# Altium PCB RC_Car_ATMEGA8.PcbDoc
Units mm, origin at the board's own origin, x right, y up, seen from the top; angles counter-clockwise.
Board outline 80.4 x 99.1 mm, 2 copper layers (Top Layer, Bottom Layer); 43 components, 38 nets, 170 pads, 22 vias.
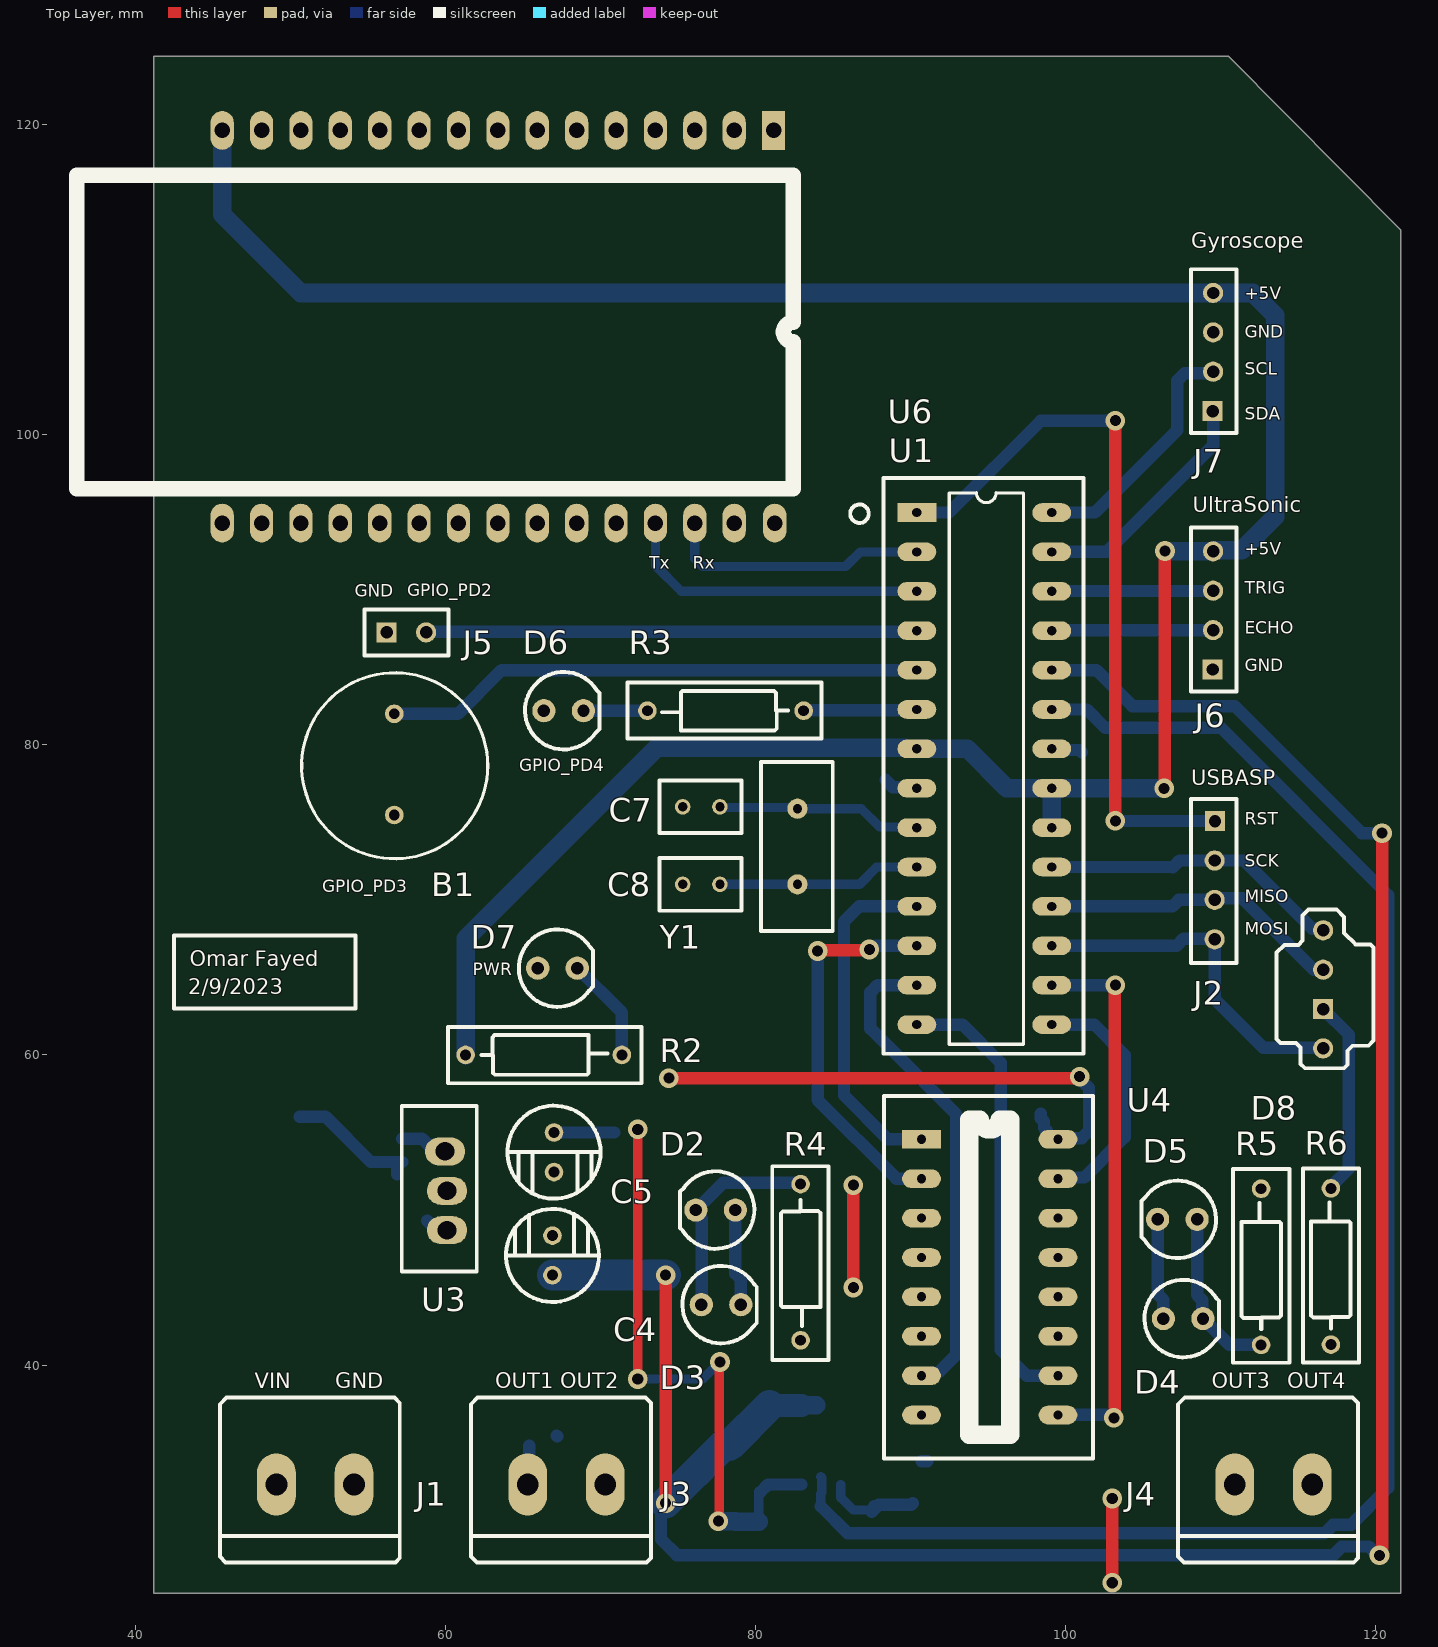
[diagram p0: Top Layer view]
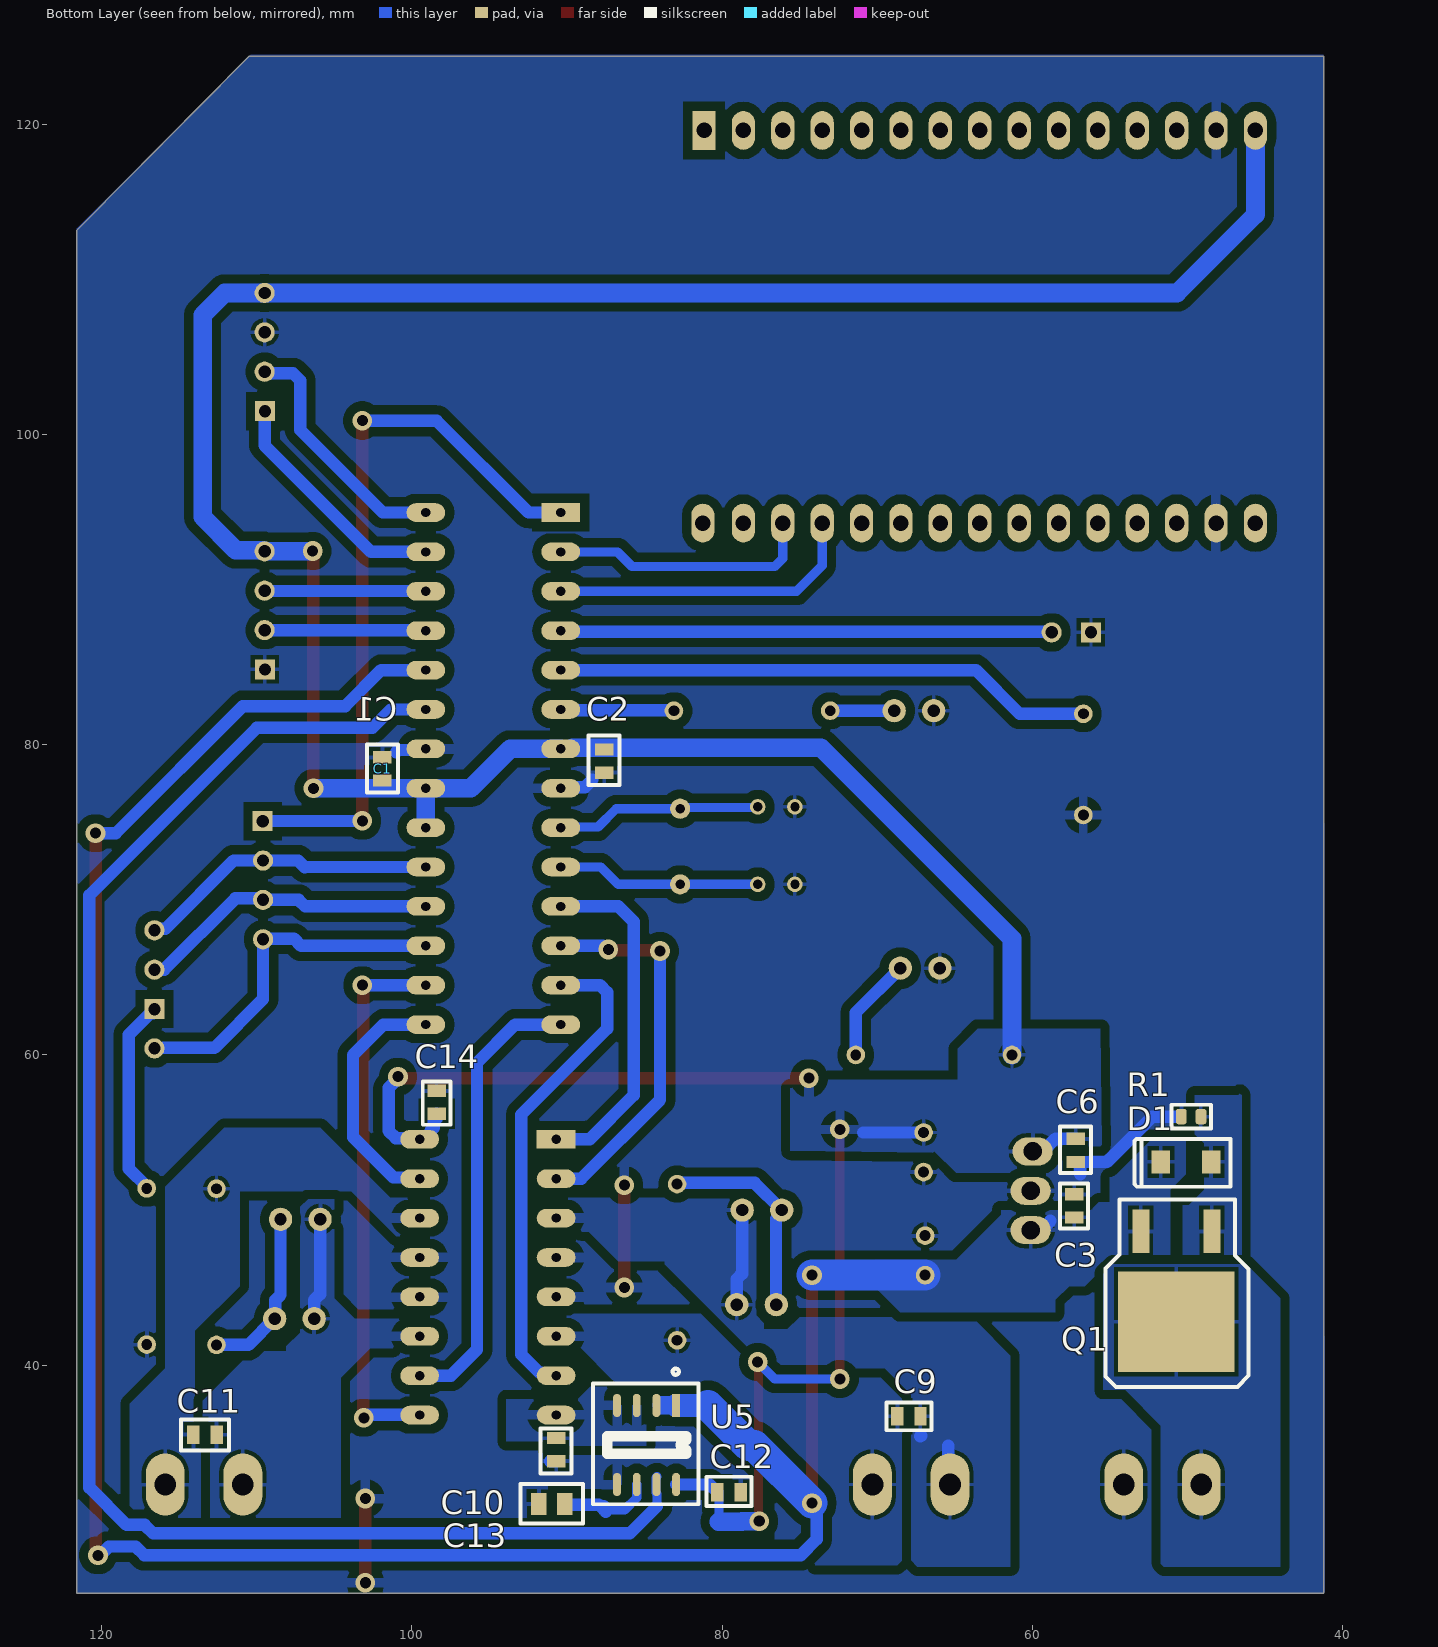
[diagram p1: Bottom Layer view, seen from below]
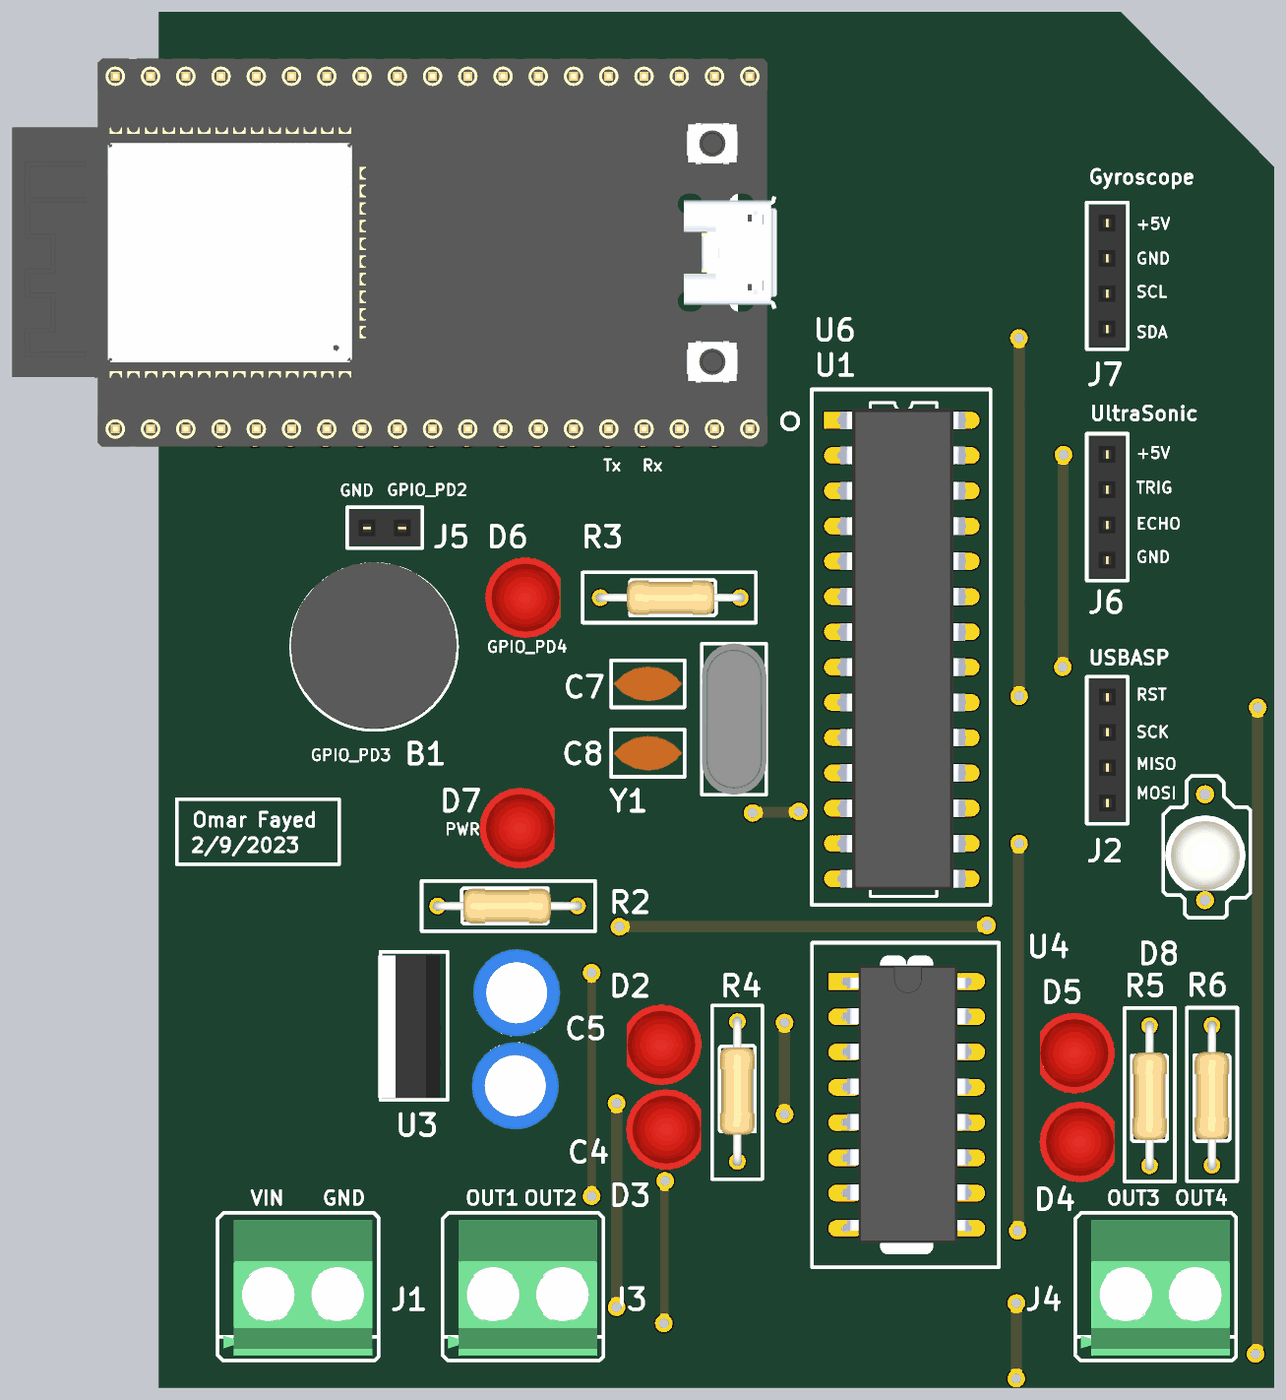
[diagram p2: 3D render of the assembled board from above, using the file's embedded part models]
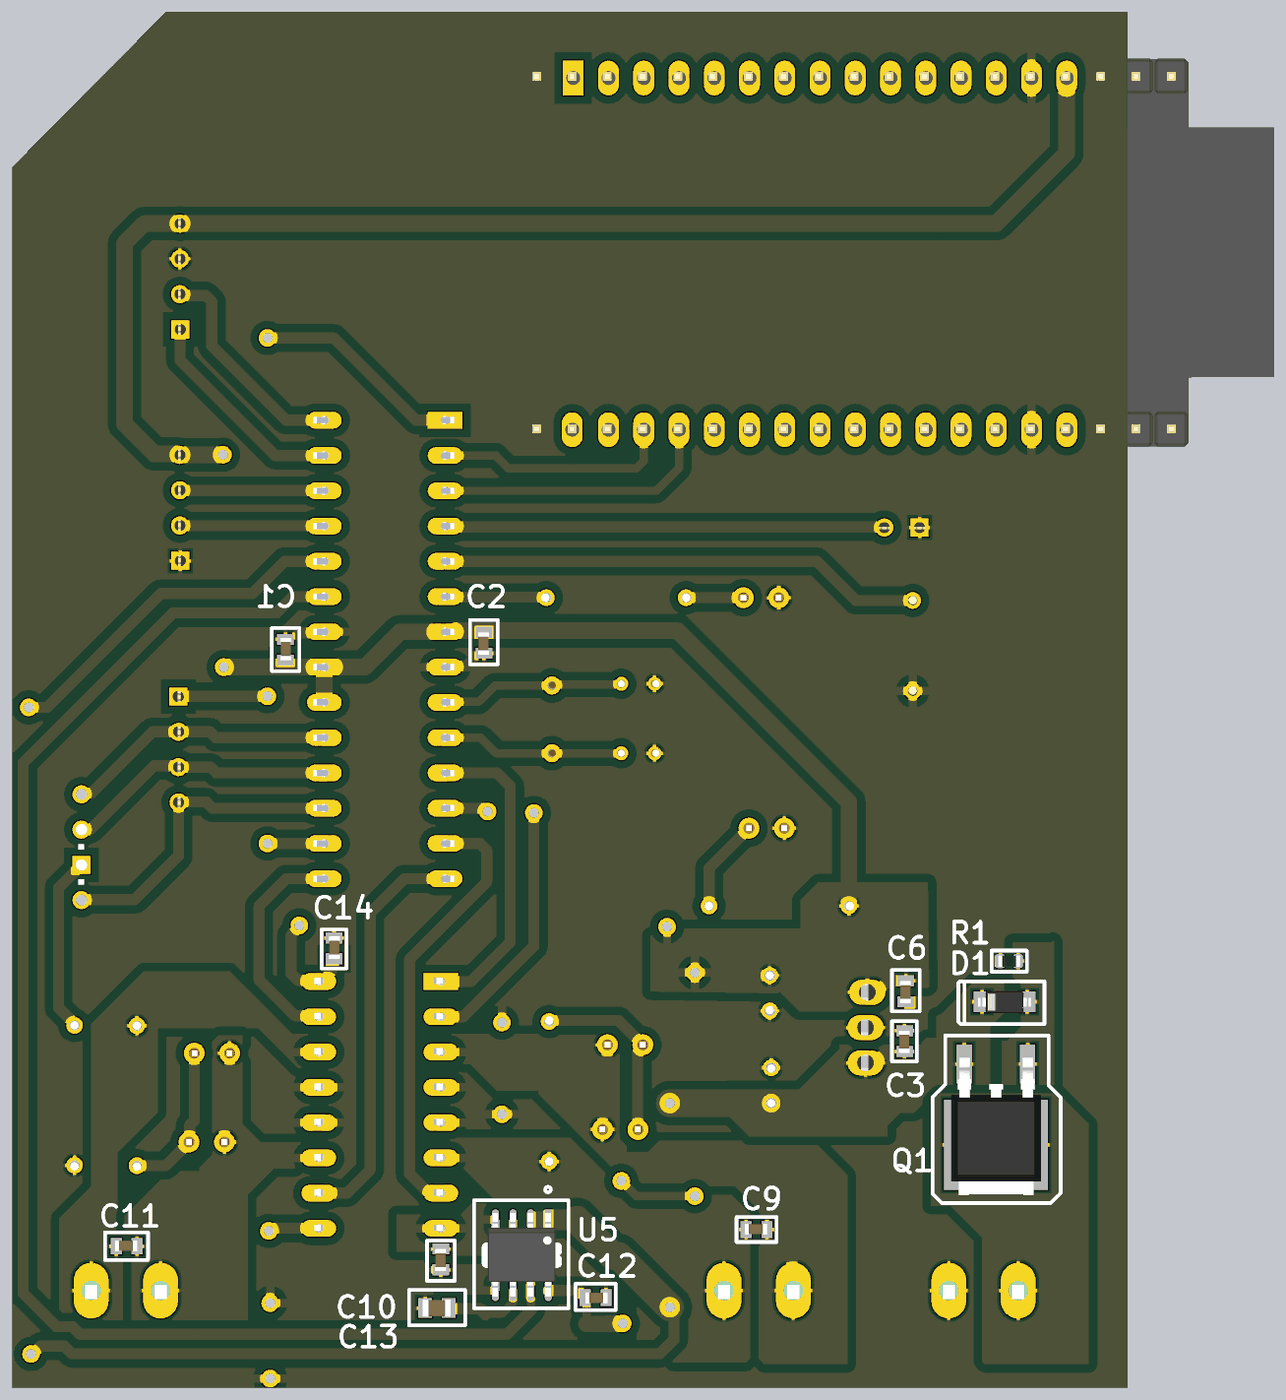
[diagram p3: 3D render of the assembled board from below, using the file's embedded part models]

## Layer stack, top to bottom
Top Solder: solder mask 0.0102, Solder Resist, Dk 3.5
Top Layer: signal copper 0.0356
Dielectric 1: dielectric 0.32, FR-4, Dk 4.8
Bottom Layer: signal copper 0.0356
Bottom Solder: solder mask 0.0102, Solder Resist, Dk 3.5

## Board outline
110.5,124.4 121.6,113.2 121.6,25.3 41.2,25.3 41.2,124.4

## Design rules (kind name [scope] priority, off if disabled: settings)
Clearance [All] p1: gap=0.6 ignorepadtopadclearanceinfootprint=TRUE
HoleSize [All] p1: absolutevalues=TRUE maxlimit=1000 minlimit=0.4 maxpercent=80.000 minpercent=20.000
HoleToHoleClearance [All] p1: gap=0.6 allowstackedmicrovias=TRUE
MinimumSolderMaskSliver [All] p1: minsoldermaskwidth=0.001
PolygonConnect [All] p1: connectstyle=Relief reliefconductorwidth=0.6 reliefentries=4 polygonreliefangle="90 Angle" airgapwidth=0.6
RoutingVias [All] p1: holewidth=0.711 width=1.27 viastyle="Through Hole" minholewidth=0.711 minwidth=1.27 maxholewidth=0.711 maxwidth=1.27
SilkToSilkClearance [All] p1: silktosilkclearance=0.001
SilkToSolderMaskClearance [IsPad] p1: minsilkscreentomaskgap=0.001 clearancetoexposedcopper=TRUE
SolderMaskExpansion [All] p1: expansion=0.102 istentingtop=FALSE
Width [All] p1: maxlimit=1817.048 minlimit=0.6 preferedwidth=0.8
25 further rules are at their usual default settings.

## Components (designator, comment, footprint, x,y, rotation, side; value= is the part's Value field where it differs from the comment)
B1 "Buzzer" "Buzzer 12mm" 56.7,75.475 r90 top
C1 "MLCC_0603" MLCC_0603 101.9,79.2 r270 bottom value=100nF
C2 "MLCC_0603" MLCC_0603 87.6,78.2 r90 bottom value=100nF
C3 "MLCC_0603" MLCC_0603 57.287,49.517 r90 bottom value=100nF
C4 "Cap_Pol_THT" Cap_Pol_6*2.5 66.9,45.8 r90 top value=220uF
C5 "Cap_Pol_THT" Cap_Pol_6*2.5 67,55 r270 top value=220uF
C6 "MLCC_0603" MLCC_0603 57.2,53.1 r90 bottom value=100nF
C7 "Capacitor Ceramic THT" "Capacitor Ceramic" 73.7,76 r0 top value=22pF
C8 "Capacitor Ceramic THT" "Capacitor Ceramic" 73.7,71 r0 top
C9 "MLCC_0603" MLCC_0603 68.7,36.7 r180 bottom value=100nF
C10 "MLCC_0805" MLCC_0805 91.827,31.046 r180 bottom value=1nF
C11 "MLCC_0603" MLCC_0603 114.089,35.5 r180 bottom value=100nF
C12 "MLCC_0603" MLCC_0603 78.8,31.8 r0 bottom value=100nF
C13 "MLCC_0603" MLCC_0603 90.7,33.8 r90 bottom value=100nF
C14 "MLCC_0603" MLCC_0603 98.4,57.7 r270 bottom value=100nF
D1 "10V" Zener_ 48.46,53.1 r0 bottom
D2 "LED THT" "LED THT 5mm" 76.15,50 r0 top
D3 "LED THT" "LED THT 5mm" 79.05,43.9 r180 top
D4 "LED THT" "LED THT 5mm" 108.85,43 r180 top
D5 "LED THT" "LED THT 5mm" 105.922,49.4 r0 top
D6 "LED THT" "LED THT 5mm" 68.9,82.2 r180 top
D7 "LED THT" "LED THT 5mm" 68.5,65.6 r180 top
D8 "RGB_LED_THT" "RGB LED THT" 116.6,60.42 r90 top
J1 "TerminalBlock_5mm" TerminalBlock_5mm 49.1,32.3 r0 top
J2 "PinSocket THT (1 * 4)" "PinSocket (1 * 4) 2.54" 109.6,75.08 r270 top
J3 "TerminalBlock_5mm" TerminalBlock_5mm 65.3,32.3 r0 top
J4 "TerminalBlock_5mm" TerminalBlock_5mm 110.9,32.3 r0 top
J5 "PinSocket 1 * 2" "PinSocket 1 * 2 2.54" 56.208,87.248 r0 top
J6 "PinSocket THT (1 * 4)" "PinSocket (1 * 4) 2.54" 109.5,84.86 r90 top
J7 "PinSocket THT (1 * 4)" "PinSocket (1 * 4) 2.54" 109.5,101.52 r90 top
Q1 "AOD403" TO_252 48.414,48.625 r0 bottom
R1 "Resistor_SMD_0603" Resistor_SMD_0603 50.384,56.027 r180 bottom value=100K
R2 "Resistor_THT" "Resistor THT" 71.375,60 r180 top value=330R
R3 "Resistor_THT" "Resistor THT" 73.025,82.2 r0 top value=330R
R4 "Resistor_THT" "Resistor THT" 82.9,41.6 r90 top value=330R
R5 "Resistor_THT" "Resistor THT" 112.6,51.375 r270 top value=330R
R6 "Resistor_THT" "Resistor THT" 117.1,51.4 r270 top value=1K
U1 "Atmega8" Atmega8_DIP28 90.4,94.98 r0 top
U3 "L7805" L7805 60.1,48.7 r90 top
U4 "L293D" "L293D_DIP16 - duplicate" 90.7,54.56 r0 top
U5 "ACS712" ACS712_SOP8 82.96,37.4 r270 bottom
U6 "ESP32_DevBrd" ESP32_DevBrd_DIP30 81.16,119.625 r270 top
Y1 "Crystal" Crystal_THT 82.7,71 r90 top value=16MHz

## Footprints (in the part's own frame and the unit in brackets; to place one, negate y for a bottom-side part, rotate by r counter-clockwise, add the part's x,y. Pads: shape width x height; smd on the part's side, far side on the other; paste and mask are expansions set on the pad)
ACS712_SOP8 [mm]
  rect 1.5x0.51 smd: 1(0,0)
  oval 1.5x0.51 smd: 2(0,-1.27) 3(0,-2.54) 4(0,-3.81) 5(5.1,-3.81) 6(5.1,-2.54) 7(5.1,-1.27) 8(5.1,0)
  silkscreen extent -2.37,-5.35 6.38,1.45, body extent -0.48,-4.38 5.52,0.53, height 1.75
Atmega8_DIP28 [mm]
  rect 2.5x1.2 hole 0.6: 1(0,0)
  oval 2.5x1.2 hole 0.6: 2(0,-2.54) 3(0,-5.08) 4(0,-7.62) 5(0,-10.16) 6(0,-12.7) 7(0,-15.24) 8(0,-17.78) 9(0,-20.32) 10(0,-22.86) 11(0,-25.4) 12(0,-27.94) 13(0,-30.48) 14(0,-33.02) 15(8.7,-33.02) 16(8.7,-30.48) 17(8.7,-27.94) 18(8.7,-25.4) 19(8.7,-22.86) 20(8.7,-20.32) 21(8.7,-17.78) 22(8.7,-15.24) 23(8.7,-12.7) 24(8.7,-10.16) 25(8.7,-7.62) 26(8.7,-5.08) 27(8.7,-2.54) 28(8.7,0)
  silkscreen extent -4.3,-34.9 10.73,2.22, body extent -0.66,-33.85 9.5,0.82, height 4.57
"Buzzer 12mm" [mm]
  round 1.2 hole 0.7: 1(0,0) 2(6.525,0)
  silkscreen extent -2.82,-6.03 9.17,5.97, body extent -2.7,-6 9.3,6, height 8.5
Cap_Pol_6*2.5 [mm]
  round 1.2 hole 0.7 mask+0.07: 1(0,0) 2(2.55,0)
  silkscreen extent -1.73,-3 4.27,3, body extent -1.9,-3.15 4.4,3.15, height 11
"Capacitor Ceramic" [mm]
  round 1 hole 0.6 mask+0.102: 1(1.6,0) 2(4,0)
  silkscreen extent 0.1,-1.7 5.4,1.7, body extent 0.25,-1.25 5.25,1.25, height 5.1
Crystal_THT [mm]
  round 1.3 hole 0.6 mask+0.102: 1(0,0) 2(4.88,0)
  silkscreen extent -3,-2.27 7.9,2.35, body extent -2.99,-2.29 7.91,2.36, height 13.1
ESP32_DevBrd_DIP30 [mm]
  rect 2.5x1.5 hole 1: 1(0,0)
  oval 2.5x1.5 hole 1: 2(0,-2.54) 3(0,-5.08) 4(0,-7.62) 5(0,-10.16) 6(0,-12.7) 7(0,-15.24) 8(0,-17.78) 9(0,-20.32) 10(0,-22.86) 11(0,-25.4) 12(0,-27.94) 13(0,-30.48) 14(0,-33.02) 15(0,-35.56) 16(25.325,-35.56) 17(25.325,-33.02) 18(25.325,-30.48) 19(25.325,-27.94) 20(25.325,-25.4) 21(25.325,-22.86) 22(25.325,-20.32) 23(25.325,-17.78) 24(25.325,-15.24) 25(25.325,-12.7) 26(25.325,-10.16) 27(25.325,-7.62) 28(25.325,-5.08) 29(25.325,-2.54) 30(25.325,0.075)
  silkscreen extent 2.89,-44.93 23.11,1.27, body extent -1.4,-50.52 26.54,4.58, height 7.25
"L293D_DIP16 - duplicate" [mm]
  rect 2.5x1.2 hole 0.6: 1(0,0)
  oval 2.5x1.2 hole 0.6: 2(0,-2.54) 3(0,-5.08) 4(0,-7.62) 5(0,-10.16) 6(0,-12.7) 7(0,-15.24) 8(0,-17.78) 9(8.8,-17.78) 10(8.8,-15.24) 11(8.8,-12.7) 12(8.8,-10.16) 13(8.8,-7.62) 14(8.8,-5.08) 15(8.8,-2.54) 16(8.8,0)
  silkscreen extent -2.41,-20.57 11.05,2.79, body extent -0.13,-18.84 9.11,1.16, height 5.1
L7805 [mm] "Voltage regulator"
  oval 1.8x2.6 hole 1.2 mask+0.102: 1(0,0) 2(2.54,0) 3(5.08,0.127)
  silkscreen extent -2.67,-1.92 8,2.92, body extent -2.51,-1.37 7.74,3.09, height 22.77
"LED THT 5mm" [mm]
  round 1.5 hole 0.8 mask+0.102: +(0,0) -(2.55,0)
  silkscreen extent -1.02,-2.5 3.77,2.5, body extent -1.23,-2.9 4.16,2.9, height 11.6
MLCC_0603 [mm]
  rect 0.8x1.2 smd mask+0.102: 1(0,0) 2(1.5,0)
  body extent -0.1,-0.37 1.5,0.43, height 0.8
MLCC_0805 [mm]
  rect 1x1.4 smd mask+0.102: 1(0,0) 2(1.7,0)
  silkscreen extent -1.17,-1.25 2.88,1.3, body extent -0.17,-0.63 1.83,0.63, height 1.25
"PinSocket 1 * 2 2.54" [mm]
  rect 1.3x1.3 hole 0.8 mask+0.102: 1(0,0)
  round 1.3 hole 0.8 mask+0.102: 2(2.54,0)
  silkscreen extent -1.43,-1.48 4,1.48, body extent -1.26,-1.29 3.82,1.25, height 7
"PinSocket (1 * 4) 2.54" [mm]
  rect 1.3x1.3 hole 0.8 mask+0.102: 1(0,0.025)
  round 1.3 hole 0.8 mask+0.102: 2(2.54,0) 3(5.08,0) 4(7.62,0)
  silkscreen extent -1.43,-1.53 9.15,1.43, body extent -1.23,-1.32 8.93,1.22, height 7
"Resistor THT" [mm]
  round 1.2 hole 0.7 mask+0.102: 1(0,0) 2(10.075,0)
  silkscreen extent -1.28,-1.8 11.22,1.83, body extent -0.31,-1.24 10.45,1.26, height 2.49
Resistor_SMD_0603 [mm]
  rrect50% 0.7x1 smd paste+0 mask+0.07: 1(0,0) 2(1.27,0)
  silkscreen extent -0.64,-0.76 1.91,0.76, body extent -0.17,-0.4 1.44,0.4, height 0.45
"RGB LED THT" [mm]
  rect 1.3x1.3 hole 0.8 mask+0.102: -(2.54,0)
  round 1.3 hole 0.8 mask+0.102: B(7.62,0) G(5.08,0) R(0,0)
  silkscreen extent -1.28,-3.25 8.95,3, body extent 0.71,-2.92 6.09,2.88, height 11.6
TerminalBlock_5mm [mm]
  oval 2.5x4 hole 1.4 mask+0.102: 1(0,0) 2(5,0)
  silkscreen extent -3.65,-5.02 7.95,5.6, body extent -3.24,-4.7 7.5,5.1, height 13.8
TO_252 [mm]
  rect 7.5x6.5 smd mask+0.102: D(2.286,5.825)
  rect 1.1x2.8 smd mask+0.102: G(0,0) S(4.572,0)
  silkscreen extent -2.37,-2.05 6.85,10.02, body extent -0.97,-0.45 5.53,9.45, height 2.32
Zener_ [mm]
  rect 1.2x1.5 smd mask+0.102: +(0,0) -(3.24,0)
  silkscreen extent -1.25,-1.48 4.95,1.6, body extent -0.27,-0.77 3.52,0.83, height 1.25

## Part data
D1: library part Zener_SMD
D2 D3 D4 D5 D6 D7: "Through hole LED"
J1 J3 J4: "Screw terminal connector 2 * Pins"
Q1: library part P-Mosfet_AOD403, "AOD403 SMD MOSFET Transistor P-Channel 30V 15A 3.5V @ 250uA 6mΩ @ 20A,20V 2.5W TO-252-2(DPAK)"
U1: library part Atemega8, "MCU"
U3: "5V voltage regulator"
U4: "Motor Driver"
U5: "Current sensor 5A"

## Via types
v1: diameter 1.27, hole 0.711, Top Layer to Bottom Layer, 22 vias

## Nets (pads, with @x,y where several pads share a name; then routed paths per layer and width w, separated by ;. In a path a pad name is that pad's centre, name@x,y a point inside that pad or via, vN(x,y) a via of type N, cw(c..) or ccw(c..) an arc to the next point about the centre after c; other vN are vias at no path point)
+5V: C1.2 C2.2 C5.1 C6.2 C12.2 C14.2 J6.4 J7.4 R2.2 U1.7 U1.20 U1.21 U3.3 U4.16 U5.8 U6.15 | length 254.4
  Top Layer w0.6: v1(72.4,39.1) v1(72.4,55.2) ; v1(77.6,29.935) 77.65,29.985 77.65,40.15 v1(77.7,40.2)
  Top Layer w0.8: v1(74.4,58.5) 100.8,58.5 v1(100.9,58.6) ; v1(106.349,77.198) 106.374,77.224 106.374,92.474 v1(106.4,92.5)
  Bottom Layer w0.6: v1(72.4,39.1) 76.6,39.1 v1(77.7,40.2) ; 80.2,29.9 C12.2@80.2,31.869
  Bottom Layer w0.8: C6.2 58.482,54.6 59.302,53.78 U3.3 ; C5.1 70.9,55 ; C12.2 80.8,32.3 U5.8 ; C14.2 98.4,55.9 98.6,55.7 98.6,55.3 98.773,55.127 98.773,54.745 98.958,54.56 U4.16 99.577,54.637 101.031,54.637 101.5,55.105 101.5,57.873 100.9,58.473 v1(100.9,58.6) ; v1@106.347,77.2 v1(106.349,77.198) ; v1(106.4,92.5) v1@106.41,92.49 ; J6.4@109.49,92.49 J6.4 J6.4@109.57,92.55
  Bottom Layer w1.2: U6.15 45.6,114.2 50.66,109.14 J7.4 112.06,109.14 113.5,107.7 113.5,94.7 111.35,92.55 J6.4@109.57,92.55 ; R2.2 61.3,67.5 73.618,79.818 U1.7@89.635,79.818 ; v1(77.6,29.935) 77.613,29.922 78.693,29.922 78.715,29.9 80.2,29.9 ; U1.7 93.66,79.74 96.2,77.2 U1.21 ; U1.20 U1.21 ; v1@106.347,77.2 U1.21 ; v1@106.41,92.49 J6.4@109.49,92.49
Buzzer: B1.2 U1.5 | length 34.9
  Bottom Layer w0.8: B1.2 60.8,82 63.62,84.82 U1.5
Echo: J6.2 U1.25 | length 10.4
  Bottom Layer w0.8: U1.25 99.12,87.38 109.48,87.38 J6.2
EN1: U1.11 U4.1 | length 22.5
  Bottom Layer w0.8: U1.11 86.68,69.58 85.7,68.6 85.7,57.4 88.54,54.56 U4.1
EN2: U1.16 U4.9 | length 35.7
  Top Layer w0.8: v1(103.1,36.6) 103.15,36.65 103.15,64.45 v1(103.2,64.5)
  Bottom Layer w0.8: U1.16 v1(103.2,64.5) ; U4.9 99.51,36.79 102.783,36.79 102.973,36.6 v1(103.1,36.6)
GND: B1.1 C1.1 C2.1 C3.2 C4.2 C5.2 C6.1 C7.1 C8.1 C10.1 C12.1 C13.1 C14.1 D6.- D7.- J1.2 J5.1 J6.1 J7.3 R1.1 R6.2 U1.8 U1.22 U3.2 U4.4 U4.5 U4.12 U4.13 U5.5 U6.14 U6.17 | length 25.3
  Top Layer w0.8: v1(86.3,45) v1(86.3,51.6) ; v1(103,25.965) v1(103,31.4)
  Bottom Layer w0.8: R1.1@50.6,56.027 52.254,56.027 55.181,53.1 C6.1 ; 56.9,52.3 56.9,52.6 ; 88.375,77.739 88.838,77.277 90.323,77.277 U1.8 ; C13.1 C13.1@91.069,33.8 ; U1.22 99.177,79.663 100.888,79.663 101.028,79.523 ; v1(103,25.965) v1@103,26.2 ; v1(103,31.4) 103.1,31.5 v1@103.1,31.6
GPIO: J5.2 U1.4 | length 31.8
  Bottom Layer w0.8: J5.2@58.7,87.2 J5.2 58.796,87.296 59.149,87.296 59.154,87.3 90.34,87.3 U1.4
I_SEN: U1.23 U5.7 | length 105.4
  Bottom Layer w0.6: 84.2,30.9 84.2,31.702 84.26,31.762 84.26,32.74 U5.7@84.2,32.8
  Bottom Layer w0.8: 84.2,30.9 85.95,29.15 116.682,29.15 117.232,29.7 118.4,29.7 120.8,32.1 120.8,70.3 110,81.1 102.542,81.1 101.362,82.28 U1.23
IN1: U1.12 U4.2 | length 24.9
  Top Layer w0.8: v1(84,66.7) 84.05,66.75 87.285,66.75 v1(87.335,66.8)
  Bottom Layer w0.8: v1(84,66.7) 84,57.1 89.08,52.02 U4.2 ; v1(87.335,66.8) 87.462,66.8 87.702,67.04 U1.12
IN2: U1.13 U4.7 | length 31.7
  Bottom Layer w0.8: U1.13 87.869,64.5 87.4,64.031 87.4,61.7 92.95,56.15 92.95,40.681 91.789,39.52 91.658,39.52 91.458,39.32 U4.7
IN3: U1.14 U4.10 | length 29.3
  Bottom Layer w0.8: U1.14 93.34,61.96 95.8,59.5 95.8,41 97.48,39.32 U4.10
IN4: U1.15 U4.15 | length 16.2
  Bottom Layer w0.8: U1.15 101.84,61.96 103.8,60 103.8,54.7 101.197,52.097 99.577,52.097 U4.15
Ind_led: R3.2 U1.6 | length 7.4
  Bottom Layer w0.8: R3.2@83.125,82.2 R3.2 83.14,82.24 90.36,82.24 U1.6
MISO: D8.G J2.3 U1.18 | length 19.6
  Bottom Layer w0.8: U1.18 106.88,69.58 107.3,70 J2.3 109.696,70.096 110.496,70.096 110.5,70.1 111.382,70.1 115.982,65.5 D8.G
MOSI: D8.R J2.4 U1.17 | length 22.4
  Bottom Layer w0.8: U1.17 107.14,67.04 107.6,67.5 109.56,67.5 J2.4 109.6,63.6 112.74,60.46 D8.R@116,60.46 ; D8.R@116.6,60.3 D8.R
NetC7_2: C7.2 U1.9 Y1.2 | length 13.3
  Bottom Layer w0.6: C7.2@77.738,75.962 Y1.2@82.618,75.962 ; Y1.2 86.82,75.88 88,74.7 U1.9@90.36,74.7
  Bottom Layer w0.8: C7.2 C7.2@77.738,75.962 ; Y1.2@82.618,75.962 Y1.2 ; U1.9@90.36,74.7 U1.9
NetC8_2: C8.2 U1.10 Y1.1 | length 13.2
  Bottom Layer w0.6: C8.2 Y1.1 86.7,71 87.82,72.12 U1.10
NetC10_2: C10.2 U5.6 | length 6.2
  Bottom Layer w0.6: U5.6 85.5,31.442 86.292,30.65 87.248,30.65
  Bottom Layer w0.8: 87.639,30.9 87.639,30.691 87.498,30.55 87.95,31.001 90.027,31.001 C10.2@90.127,31.101
NetD1_+: D1.+ Q1.G R1.2
NetD2_+: D2.+ D3.- R4.2 | length 13.8
  Bottom Layer w0.8: D3.- 76.5,44.202 76.521,44.223 76.521,49.439 76.15,49.811 D2.+ 77.9,51.75 82.825,51.75 R4.2
NetD4_+: D4.+ D5.- R5.2 | length 11
  Bottom Layer w0.8: D5.- 108.472,44.528 108.8,44.2 108.8,43.05 D4.+ 110.55,41.3 R5.2
NetD6_+: D6.+ R3.1 | length 4.1
  Bottom Layer w0.8: D6.+ R3.1
NetD7_+: D7.+ R2.1 | length 6.8
  Bottom Layer w0.8: D7.+ 71.375,62.725 R2.1
NetD8_-: D8.- R6.1 | length 13.1
  Bottom Layer w0.8: D8.-@116.379,62.975 D8.-@116.673,62.68 ; D8.- 118.25,61.31 118.25,52.658 117.1,51.508 R6.1
OUT1: C9.2 D2.- D3.+ J3.1 U4.3 | length 8.9
  Bottom Layer w0.8: J3.1 65.407,32.407 65.407,34.807 ; 67.162,35.453 67.215,35.4 ; D2.- 78.7,45.9 79.05,45.55 D3.+
OUT2: C9.1 J3.2 R4.1 U4.6
OUT3: C11.2 D4.- D5.+ J4.1 U4.11 | length 6.6
  Bottom Layer w0.8: D5.+ 105.922,44.578 106.3,44.2 D4.-
OUT4: C11.1 J4.2 R5.1 U4.14
RESET: J2.1 U1.1 | length 47.5
  Top Layer w0.8: v1(103.194,100.906) 103.2,100.9 v1(103.2,75.1)
  Bottom Layer w0.8: U1.1 92.48,94.98 98.4,100.9 103.188,100.9 v1(103.194,100.906) ; v1(103.2,75.1) 103.21,75.09 109.615,75.09 J2.1
RXD: U1.2 U6.28 | length 17.2
  Bottom Layer w0.6: U6.28 76.08,92.02 76.6,91.5 85.8,91.5 86.74,92.44 U1.2
SCK: D8.B J2.2 U1.19 | length 19.6
  Bottom Layer w0.8: U1.19 106.88,72.12 106.9,72.1 107.34,72.54 J2.2 111.5,72.54 115.904,68.136 116.504,68.136 D8.B
SCL: J7.2 U1.28 | length 16
  Bottom Layer w0.8: U1.28 101.88,94.98 107.2,100.3 107.2,103.496 107.669,103.964 109.404,103.964 J7.2
SDA: J7.1 U1.27 | length 15.6
  Bottom Layer w0.6: U1.27 U1.27@99.215,92.555
  Bottom Layer w0.8: U1.27 102.64,92.44 109.5,99.3 109.5,101.495 J7.1
Tirg: J6.3 U1.26 | length 10.4
  Bottom Layer w0.8: U1.26 99.12,89.92 109.48,89.92 J6.3
TXD: U1.3 U6.27 | length 20.3
  Bottom Layer w0.6: U6.27 73.54,91.56 75.2,89.9 U1.3
VCC: C3.1 C4.1 D1.- Q1.S U1.24 U3.1 U5.1 U5.2 | length 157.8
  Top Layer w0.8: v1(74.2,31.1) v1(74.2,45.8) ; v1(120.237,27.735) 120.327,27.825 120.327,28.157 120.4,28.23 v1(120.4,74.3)
  Bottom Layer w0.8: 58.829,49.3 59.429,48.7 U3.1 ; v1(74.2,31.1) 74.2,30.973 73.9,30.673 73.9,28.769 74.919,27.75 117.262,27.75 117.812,28.3 119.545,28.3 120.11,27.735 v1(120.237,27.735) ; U1.24 101.98,84.82 104.3,82.5 110.9,82.5 119.1,74.3 v1(120.4,74.3)
  Bottom Layer w1.2: U5.1 83.9,37.4
  Bottom Layer w1.5: 80.9,37.4 U5.1
  Bottom Layer w2: C4.1 v1(74.2,45.8) ; v1(74.2,31.1) 77.9,34.8 78.3,34.8 80.9,37.4
VIN: J1.1 Q1.D
VS-SEN: C13.2 U4.8 U5.3 U5.4
pads on no net: U6.1 U6.2 U6.3 U6.4 U6.5 U6.6 U6.7 U6.8 U6.9 U6.10 U6.11 U6.12 U6.13 U6.16 U6.18 U6.19 U6.20 U6.21 U6.22 U6.23 U6.24 U6.25 U6.26 U6.29 U6.30

## Polygon pours and split planes (outlines as drawn)
GND on Bottom Layer "GND_L02_P009" (solid, pour order 9): 110.4,124.489 121.589,113.3 121.6,113.3 121.6,25.3 41.141,25.3 41.243,124.489
OUT3 on Bottom Layer "OUT3_L02_P006" (solid, pour order 6): 97.7,43 97.7,41.1 102.7,41.1 104.6,39.2 104.6,29.3 113,29.3 113,34.6 113.5,35.1 113.5,37.7 110.3,40.9 108.1,40.9 108.1,41.2 107.2,42.1 107.2,50.2 106.7,50.7 105,50.7 105,44.3 103.7,43 97.8,43
OUT2 on Bottom Layer "OUT2_L02_P005" (solid, pour order 5): 92,43.3 92,41.2 89.2,41.2 86.9,38.9 81.5,38.9 81.5,37.2 76.6,32.3 76.6,27.1 68.7,27.1 68.2,27.6 68.2,36.1 67.9,36.4 67.9,37.4 69.7,39.2 76.8,39.2 80.9,43.3
OUT1 on Bottom Layer "OUT1_L02_P004" (solid, pour order 4): 91.9,50.8 91.9,48.6 88.6,48.6 86.7,46.7 83.7,46.7 83.7,46.5 77,39.8 69.5,39.8 67.8,38.1 67.8,27.4 67.4,27 61.4,27 61.4,40.6 63.9,43.1 75,43.1 75.8,42.3 77.3,42.3 77.3,42.7 77.8,43.2 77.8,50.3 78.3,50.8 91.8,50.8
OUT4 on Bottom Layer "OUT4_L02_P007" (solid, pour order 7): 98.1,50.8 101.4,50.8 105.9,55.3 112.1,55.3 115.9,51.5 115.9,39.8 118.2,37.5 118.2,29.6 113.5,29.6 113.5,35.6 114,36.1 114,42.2 111.1,45.1 111.1,51.2 103.9,51.2 101,48.3 98.1,48.3
VCC on Bottom Layer "VCC_L02_P002" (solid, pour order 2): 51.1,51.3 50.1,52.3 50.1,54.6 53.3,54.6 55,52.9 55,50.5 55.7,50.5 56.2,50 62,50 62,49.7 64.9,46.8 70.1,46.8 70.1,45 68.5,43.4 58.5,43.4 58.5,44.2 57.6,45.1 56.6,45.1 54.6,47.1 51.1,47.1
+5V on Bottom Layer "+5V_L02_P008" (solid, pour order 8): 55.5,53.7 57.9,53.7 57.9,52.5 58,52.4 64.9,52.4 66.3,53.8 66.4,53.7 75.6,53.837 75.6,58.4 64.8,58.4 64.8,60.4 63.5,61.7 55.6,61.7
VS-SEN on Bottom Layer "VS-SEN_L02_P003" (solid, pour order 3): 84.9,38.6 88.5,38.6 89.3,37.8 93.9,37.8 93.9,35.1 91.6,35.1 91.3,34.8 84.9,34.8 84.9,35.9
NetD1_+ on Bottom Layer "NETD1_+_L02_P001" (solid, pour order 1): 50.3,46.7 50.3,50.3 49.9,50.3 48.9,51.3 48.9,54.3 49.5,54.9 49.5,57.4 46.7,57.4 46.6,57.5 46.5,57.4 46.5,46.7
VIN on Bottom Layer "VIN_L02_P000" (solid, pour order 0): 51.7,27.2 51.7,36.1 54,38.4 55.4,38.4 55.4,45.9 54.8,46.5 46.2,46.5 44,44.3 44,27 51.5,27

## Silkscreen, mask and mechanical layers (free items; w line width, h text height)
Top Overlay:
  lines w0.254: 42.5,63 54.2,63 54.2,67.7 42.5,67.7 42.5,63
  text "Gyroscope" at 108.1,112.033 h1
  text "+5V" at 111.55,108.75 h0.8
  text "GND" at 111.55,106.25 h0.8
  text "SCL" at 111.55,103.85 h0.8
  text "SDA" at 111.55,100.95 h0.8
  text "UltraSonic" at 108.2,95 h1
  text "+5V" at 111.55,92.25 h0.8
  text "Tx" at 73.15,91.35 h0.8
  text "Rx" at 75.95,91.35 h0.8
  text "TRIG" at 111.55,89.75 h0.8
  text "GPIO_PD2" at 57.55,89.583 h0.8
  text "GND" at 54.15,89.55 h0.8
  text "ECHO" at 111.55,87.15 h0.8
  text "GND" at 111.55,84.75 h0.8
  text "GPIO_PD4" at 64.75,78.283 h0.8
  text "USBASP" at 108.1,77.4 h1
  text "RST" at 111.55,74.85 h0.8
  text "SCK" at 111.55,72.15 h0.8
  text "GPIO_PD3" at 52.05,70.483 h0.8
  text "MISO" at 111.55,69.85 h0.8
  text "MOSI" at 111.55,67.75 h0.8
  text "Omar Fayed" at 43.5,65.733 h1
  text "PWR" at 61.75,65.15 h0.8
  text "2/9/2023" at 43.4,63.9 h1
  text "VIN" at 47.7,38.5 h1
  text "GND" at 52.9,38.5 h1
  text "OUT1" at 63.2,38.5 h1
  text "OUT2" at 67.4,38.5 h1
  text "OUT3" at 109.4,38.5 h1
  text "OUT4" at 114.3,38.5 h1
Bottom Overlay:
  lines w0.254: 56.2,52.4 58.2,52.4 58.2,55.4 56.2,55.4 56.2,52.4 ; 56.4,48.8 58.2,48.8 58.2,51.7 56.4,51.7 56.4,48.8 ; 66.5,35.8 69.4,35.8 69.4,37.6 66.5,37.6 66.5,35.8 ; 78.1,30.9 81,30.9 81,32.8 78.1,32.8 78.1,30.9 ; 86.6,77.4 88.6,77.4 88.6,80.6 86.6,80.6 86.6,77.4 ; 89.7,33 91.7,33 91.7,35.9 89.7,35.9 89.7,33 ; 97.5,55.5 99.3,55.5 99.3,58.3 97.5,58.3 97.5,55.5 ; 100.89,76.918 102.89,76.918 102.89,80.018 100.89,80.018 100.89,76.918 ; 111.8,34.5 114.9,34.5 114.9,36.5 111.8,36.5 111.8,34.5
  text "C1" at 100.95,81.566 h1.5